# Altium PCB STM32_PCB.PcbDoc (part 1 of 2)
Units mil, origin at the board's own origin, x right, y up, seen from the top; angles counter-clockwise.
Board outline 3550 x 2490 mil, 4 copper layers (Top Layer, Power, Ground, Bottom Layer); 106 components, 122 nets, 470 pads, 207 vias.
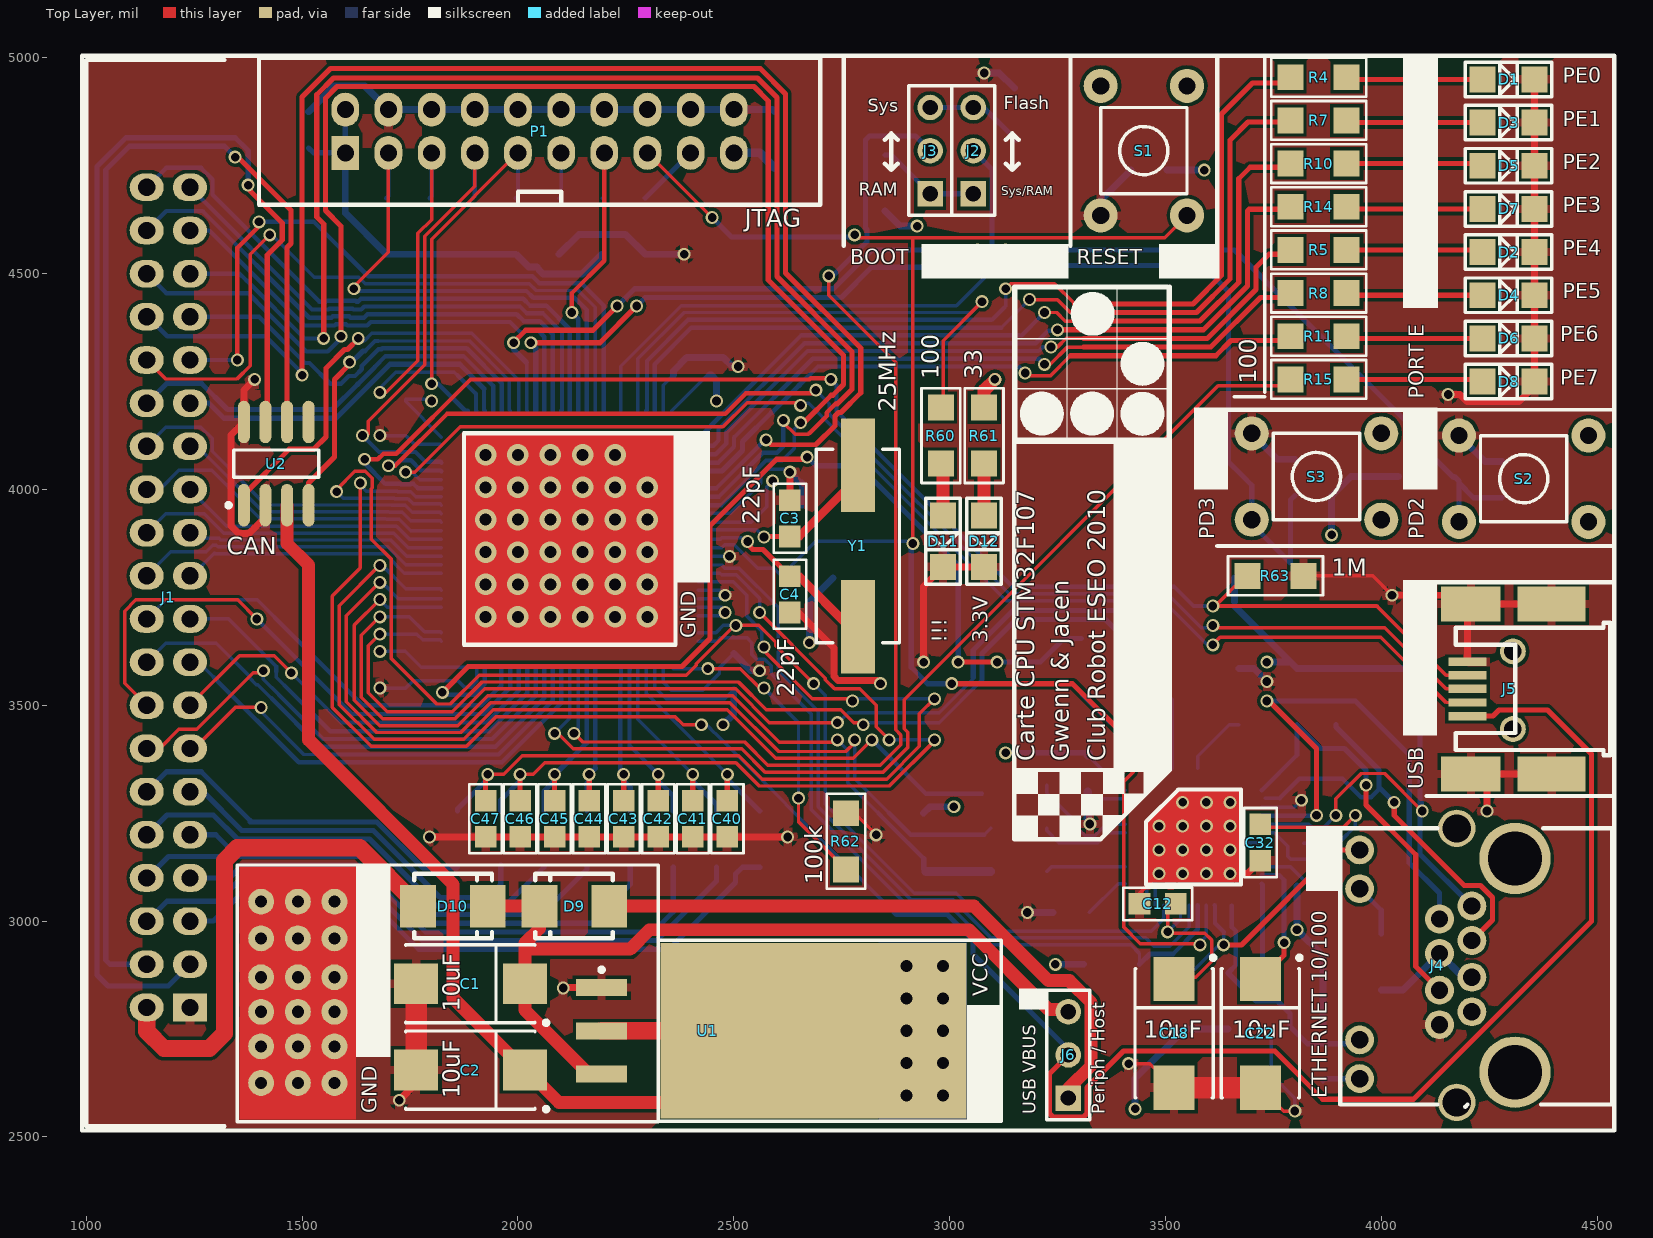
[diagram p0: Top Layer view]
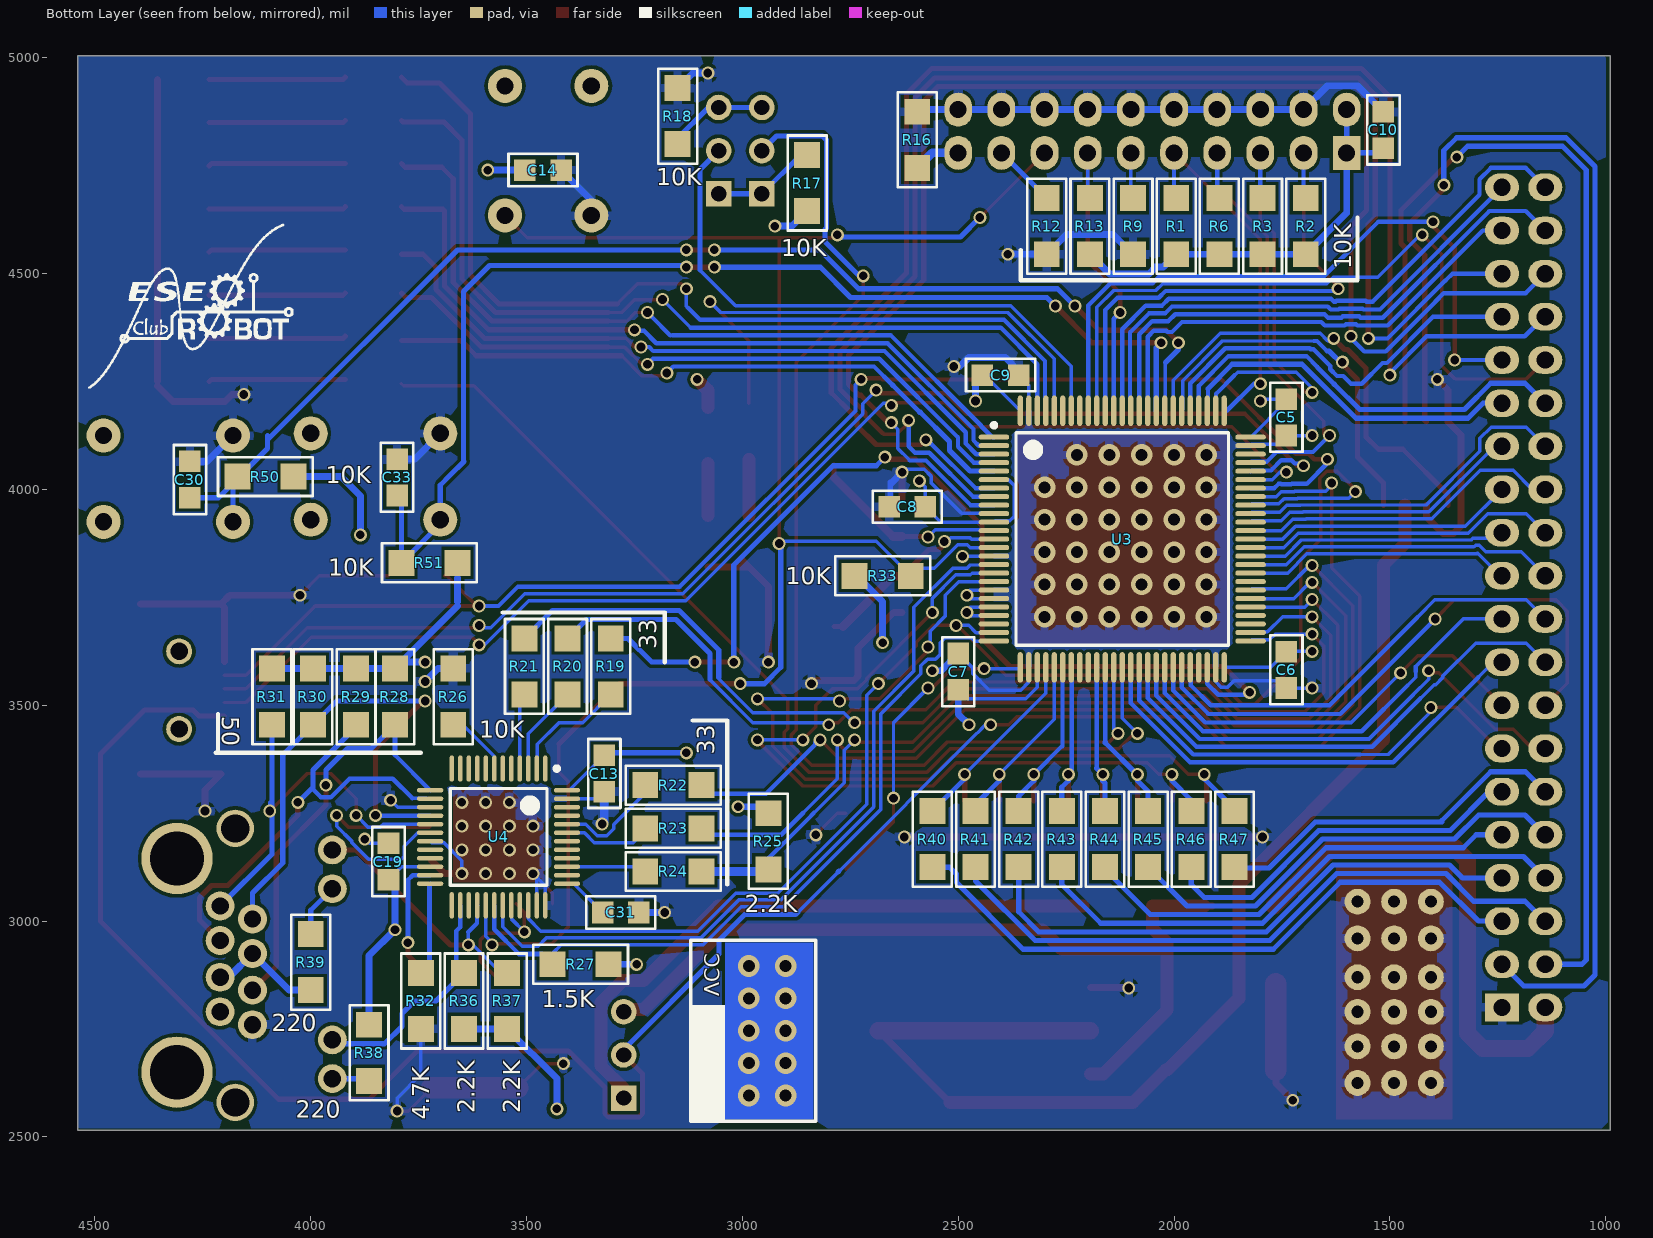
[diagram p1: Bottom Layer view, seen from below]
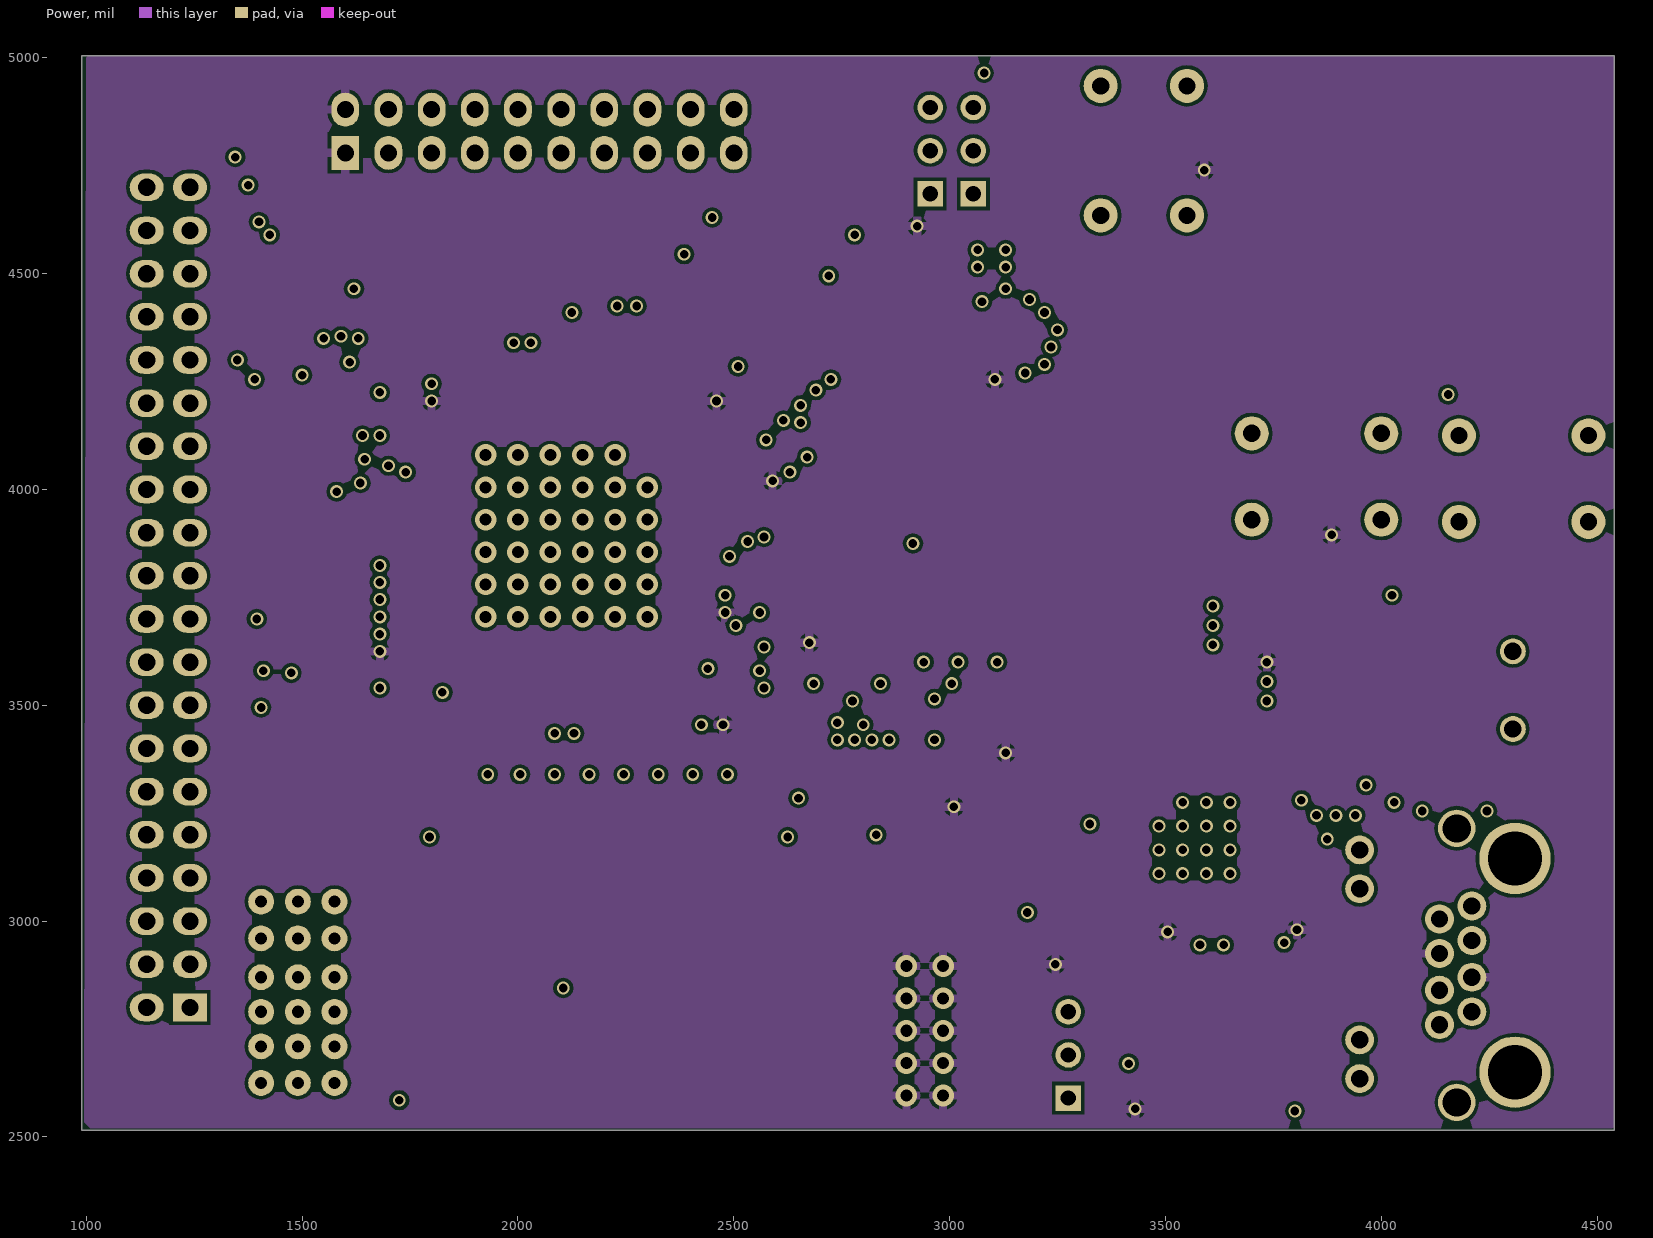
[diagram p2: Power]
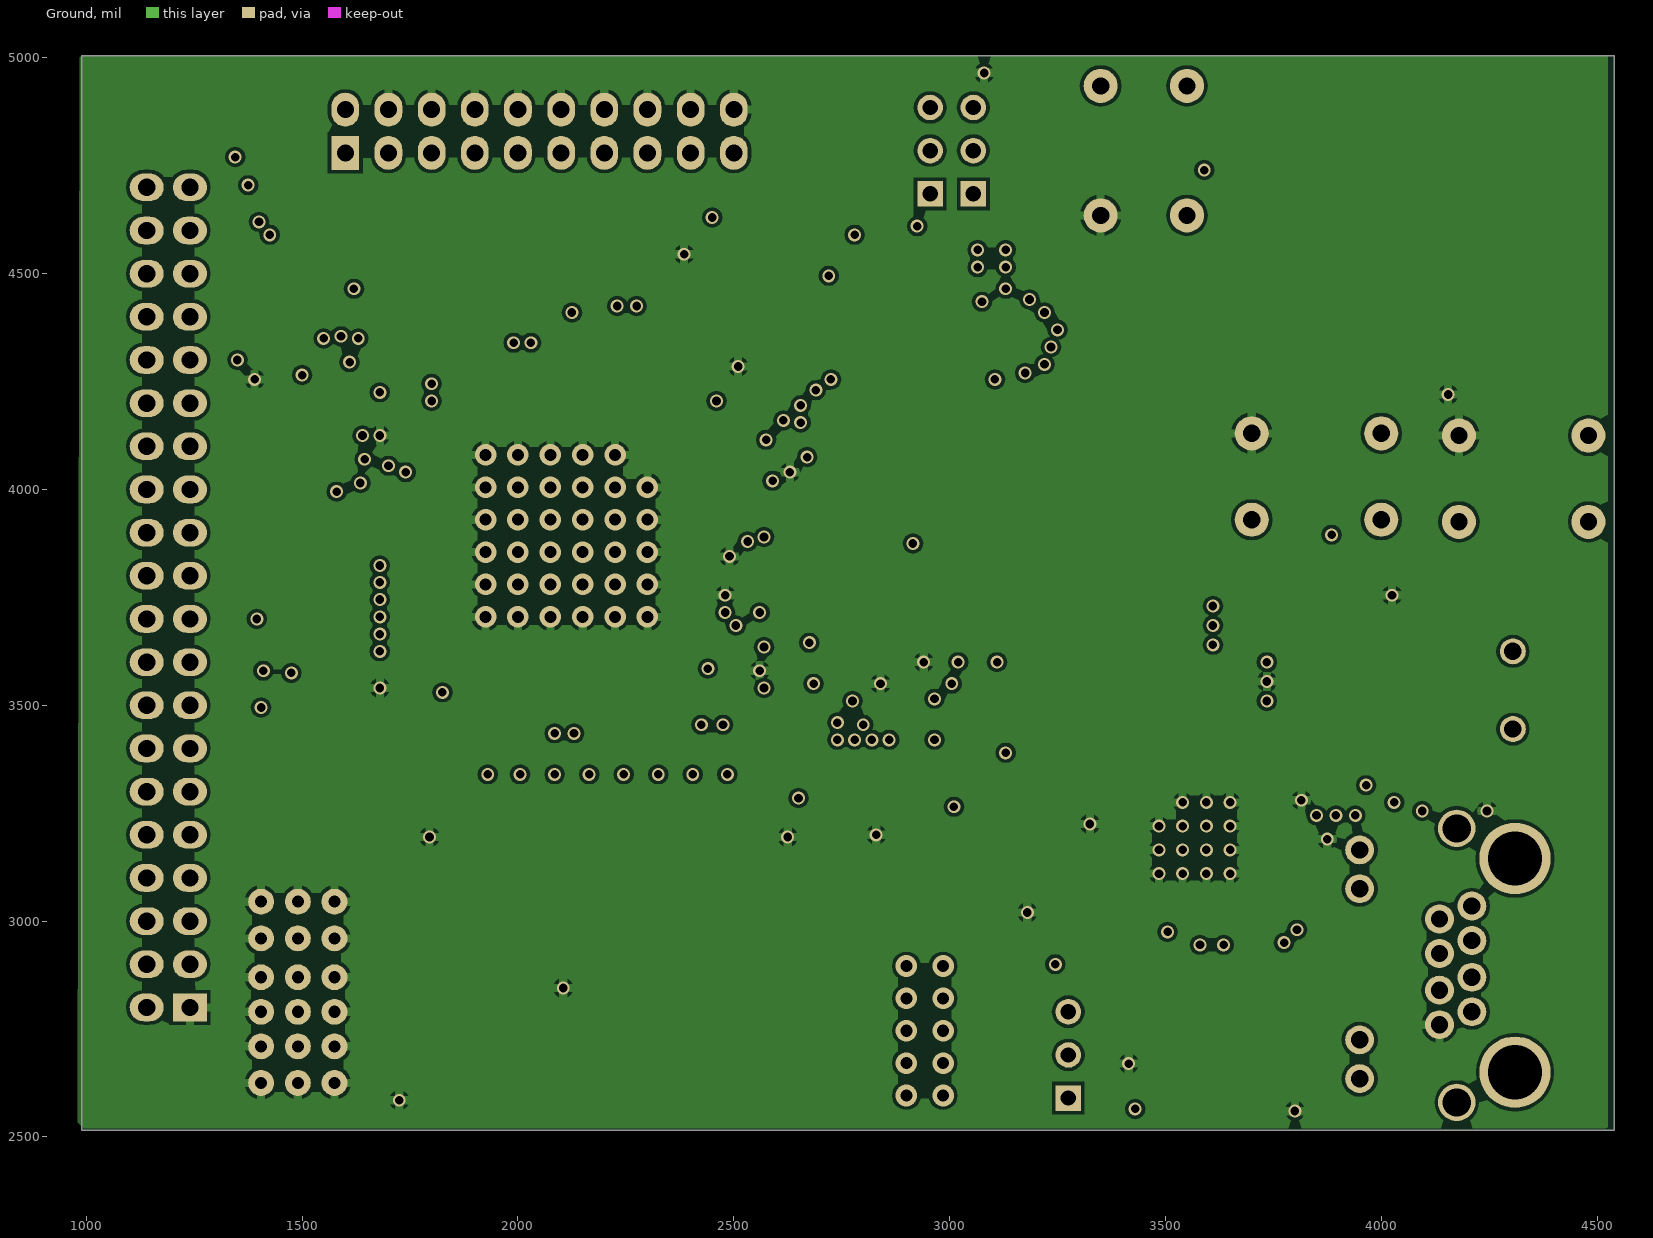
[diagram p3: Ground]
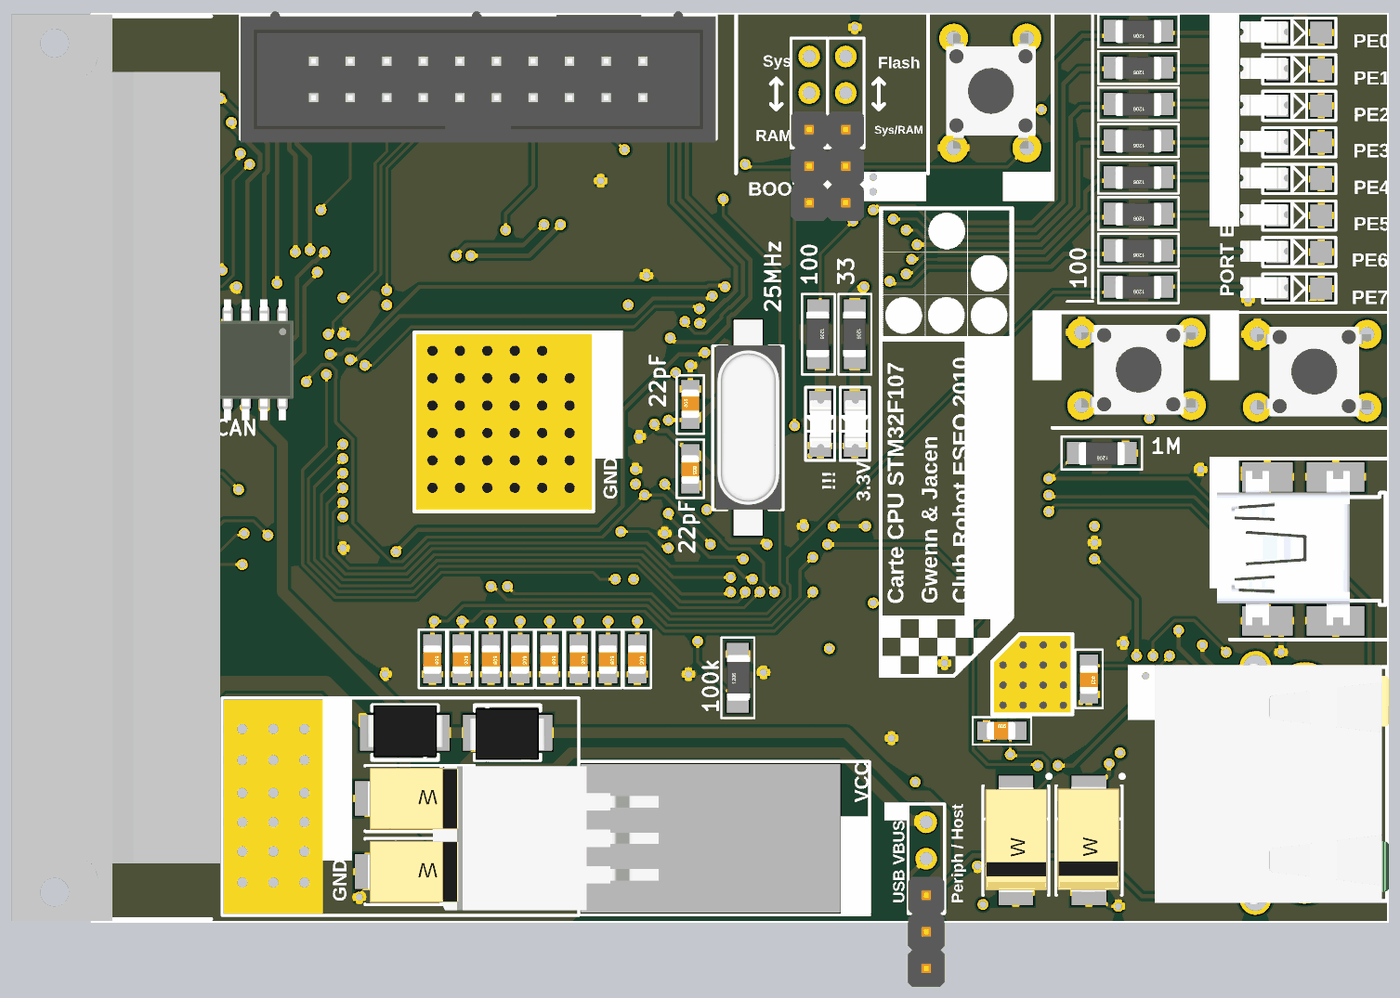
[diagram p5: 3D render of the assembled board from above, using the file's embedded part models]
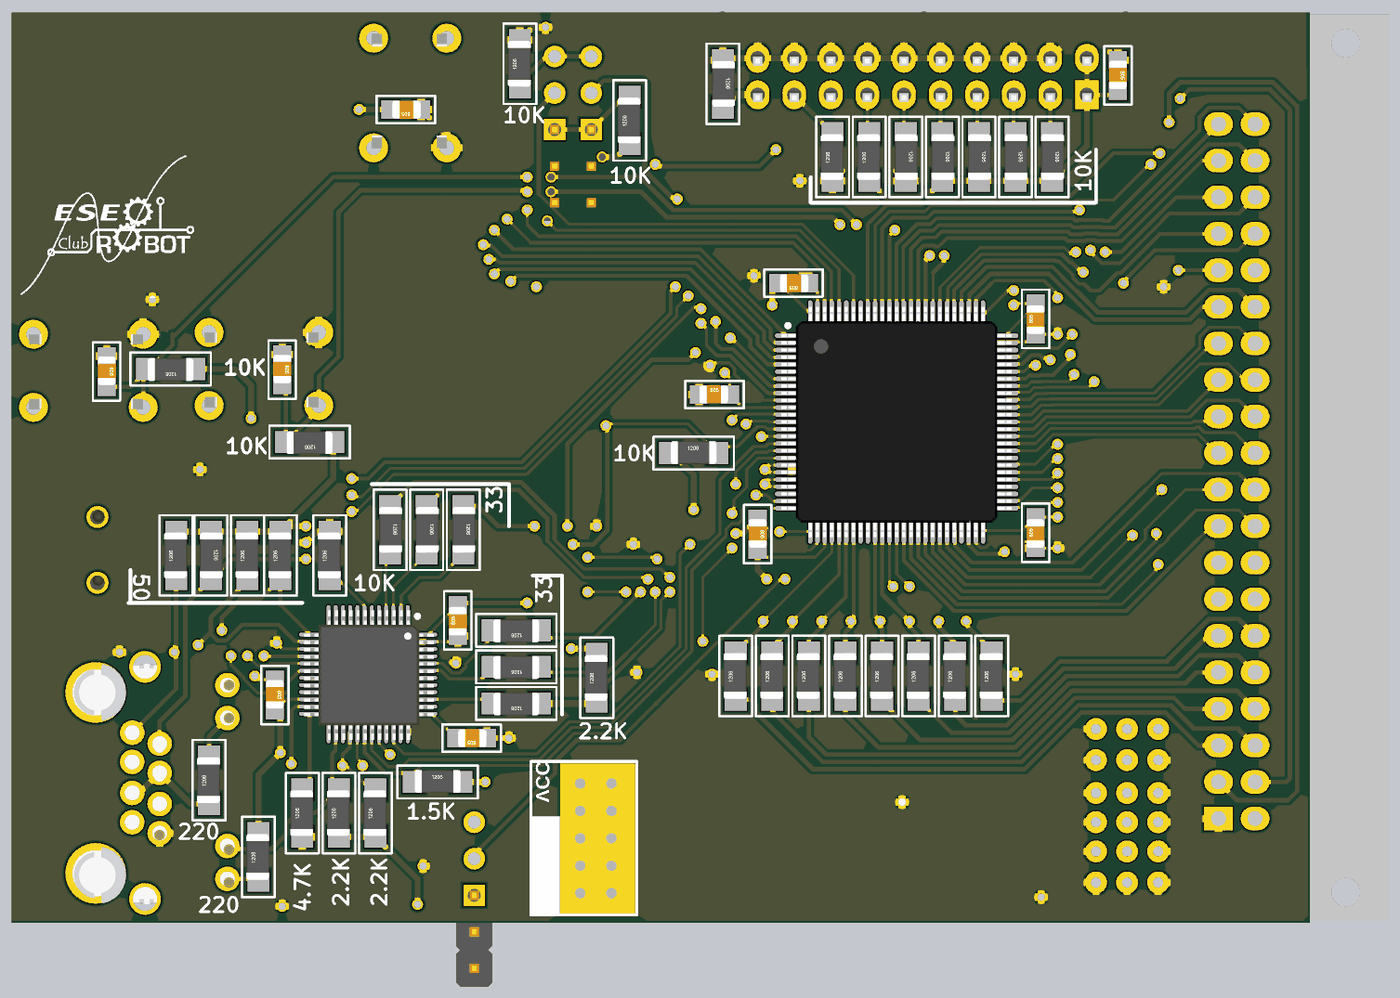
[diagram p6: 3D render of the assembled board from below, using the file's embedded part models]

## Layer stack, top to bottom
Top Layer: signal copper 1.4
Dielectric: core 12.6, FR-4, Dk 4.8
Power: signal copper 1.4
Dielectric: prepreg 12.6, FR-4, Dk 4.8
Ground: signal copper 1.4
Dielectric: core 12.6, FR-4, Dk 4.8
Bottom Layer: signal copper 1.4

## Board outline
990,2515 990,5005 4540,5005 4540,2515

## Design rules (kind name [scope] priority, off if disabled: settings)
Clearance Clearance_QFP [(InComponent('U3') OR InComponent('U4'))] p1: gap=7
Clearance [All] p2: gap=8
HoleSize [All] p1: absolutevalues=TRUE maxlimit=150 minlimit=20 maxpercent=80.000 minpercent=20.000
PlaneConnect [All] p1: planeconnectstyle=Relief reliefexpansion=20 reliefentries=4 reliefconductorwidth=20 reliefairgap=10
PolygonConnect [All] p1: connectstyle=Relief reliefconductorwidth=20 reliefentries=4 polygonreliefangle="90 Angle"
RoutingVias [All] p1: holewidth=20 width=30 viastyle="Through Hole" minholewidth=20 minwidth=30 maxholewidth=28 maxwidth=50
SMDNeckDown [All] p1 off: percent=100.000
SilkscreenOverComponentPads [All] p1: minsilkscreentomaskgap=10
SolderMaskExpansion [All] p1: expansion=4
TestPointUsage [All] p1: valid=0 allowmultiple=FALSE
Testpoint [All] p1: side=15 testpointundercomponent=TRUE minsize=40 maxsize=100 preferedsize=60 minholesize=0 maxholesize=40 preferedholesize=32 testpointgrid=1 style=1023 order=0-112345678
Width Width_POWER [(InNet('GND') OR InNet('VCC') OR InNet('5V'))] p1: maxlimit=150 minlimit=8 preferedwidth=16
Width [All] p2: maxlimit=100 minlimit=8 preferedwidth=12
21 further rules are at their usual default settings.

## Components (designator, comment, footprint, x,y, rotation, side; value= is the part's Value field where it differs from the comment)
C1 "10uF" TC7343-2917 1890,2855 r180 top
C2 "10uF" TC7343-2917 1890,2655 r180 top
C3 "22pF" COND_CMS_0805 2630,3975 r270 top
C4 "22pF" COND_CMS_0805 2630,3715 r90 top
C5 "100nF" COND_CMS_0805 1740,4125 r90 bottom
C6 "100nF" COND_CMS_0805 1740,3540 r90 bottom
C7 "100nF" COND_CMS_0805 2500,3620 r270 bottom
C8 "100nF" COND_CMS_0805 2660,3960 r180 bottom
C9 "100nF" COND_CMS_0805 2360,4265 r0 bottom
C10 "100nF" COND_CMS_0805 1515,4875 r270 bottom
C12 "100nF" COND_CMS_0805 3440,3040 r0 top
C13 "100nF" COND_CMS_0805 3320,3300 r90 bottom
C14 "100nF" COND_CMS_0805 3420,4740 r0 bottom
C18 "10uF" TC7343-2917 3520,2740 r270 top
C19 "100nF" COND_CMS_0805 3820,3180 r270 bottom
C22 "10uF" TC7343-2917 3720,2740 r270 top
C30 "100nF" COND_CMS_0805 4280,4065 r270 bottom
C31 "100nF" COND_CMS_0805 3240,3020 r0 bottom
C32 "100nF" COND_CMS_0805 3720,3140 r90 top
C33 "100nF" COND_CMS_0805 3800,4070 r270 bottom
C40 "100nF" COND_CMS_0805 2485,3195 r90 top
C41 "100nF" COND_CMS_0805 2405,3195 r90 top
C42 "100nF" COND_CMS_0805 2325,3195 r90 top
C43 "100nF" COND_CMS_0805 2245,3195 r90 top
C44 "100nF" COND_CMS_0805 2165,3195 r90 top
C45 "100nF" COND_CMS_0805 2085,3195 r90 top
C46 "100nF" COND_CMS_0805 2005,3195 r90 top
C47 "100nF" COND_CMS_0805 1925,3195 r90 top
D1 "LED" LED_1206 4355,4950 r90 top
D2 "LED" LED_1206 4355,4550 r90 top
D3 "LED" LED_1206 4355,4850 r90 top
D4 "LED" LED_1206 4355,4450 r90 top
D5 "LED" LED_1206 4355,4750 r90 top
D6 "LED" LED_1206 4355,4350 r90 top
D7 "LED" LED_1206 4355,4650 r90 top
D8 "LED" LED_1206 4355,4250 r90 top
D9 "Schottky" DIODE_SMB 2050,3035 r0 top
D10 "Schottky" DIODE_SMB 1930,3035 r180 top
D11 "LED" LED_1206 2985,3820 r0 top
D12 "LED" LED_1206 3080,3820 r0 top
J1 "Extension" HE10/40_FACTO 1240,2800 r90 top
J2 "Jumper" HEADER3 3055,4685 r90 top
J3 "Jumper" HEADER3 2955,4685 r90 top
J4 "ETHERNET 10/100" "RJ45_8/8 W/ LEDS" 4010,3025 r0 top
J5 "USB" MINI_USB_B 4200,3475 r90 top
J6 "Jumper" HEADER3 3275,2590 r90 top
P1 "JTAG" HE10-JTAG-STM 1600,4880 r0 top
R1 "10K" RES_CMS_1206 1995,4675 r270 bottom
R2 "10K" RES_CMS_1206 1695,4675 r270 bottom
R3 "10K" RES_CMS_1206 1795,4675 r270 bottom
R4 "100" RES_CMS_1206 3920,4955 r180 top
R5 "100" RES_CMS_1206 3920,4555 r180 top
R6 "10K" RES_CMS_1206 1895,4675 r270 bottom
R7 "100" RES_CMS_1206 3920,4855 r180 top
R8 "100" RES_CMS_1206 3920,4455 r180 top
R9 "10K" RES_CMS_1206 2095,4675 r270 bottom
R10 "100" RES_CMS_1206 3920,4755 r180 top
R11 "100" RES_CMS_1206 3920,4355 r180 top
R12 "10K" RES_CMS_1206 2295,4545 r90 bottom
R13 "10K" RES_CMS_1206 2195,4545 r90 bottom
R14 "100" RES_CMS_1206 3920,4655 r180 top
R15 "100" RES_CMS_1206 3920,4255 r180 top
R16 "10K" RES_CMS_1206 2595,4875 r270 bottom
R17 "10K" RES_CMS_1206 2850,4645 r90 bottom
R18 "10K" RES_CMS_1206 3150,4800 r90 bottom
R19 "33" RES_CMS_1206 3305,3655 r270 bottom
R20 "33" RES_CMS_1206 3405,3655 r270 bottom
R21 "33" RES_CMS_1206 3505,3655 r270 bottom
R22 "33" RES_CMS_1206 3095,3315 r0 bottom
R23 "33" RES_CMS_1206 3095,3215 r0 bottom
R24 "33" RES_CMS_1206 3095,3115 r0 bottom
R25 "2.2K" RES_CMS_1206 2940,3120 r90 bottom
R26 "10K" RES_CMS_1206 3670,3455 r90 bottom
R27 "1.5K" RES_CMS_1206 3440,2900 r180 bottom
R28 "50" RES_CMS_1206 3805,3455 r90 bottom
R29 "50" RES_CMS_1206 3895,3455 r90 bottom
R30 "50" RES_CMS_1206 3995,3585 r270 bottom
R31 "50" RES_CMS_1206 4090,3455 r90 bottom
R32 "4.7K" RES_CMS_1206 3745,2750 r90 bottom
R33 "10K" RES_CMS_1206 2740,3800 r180 bottom
R36 "2.2K" RES_CMS_1206 3645,2750 r90 bottom
R37 "2.2K" RES_CMS_1206 3545,2750 r90 bottom
R38 "220" RES_CMS_1206 3865,2630 r90 bottom
R39 "220" RES_CMS_1206 4000,2840 r90 bottom
R40 "100" RES_CMS_1206 2560,3125 r90 bottom
R41 "100" RES_CMS_1206 2460,3125 r90 bottom
R42 "100" RES_CMS_1206 2360,3125 r90 bottom
R43 "100" RES_CMS_1206 2260,3125 r90 bottom
R44 "100" RES_CMS_1206 2160,3125 r90 bottom
R45 "100" RES_CMS_1206 2060,3125 r90 bottom
R46 "100" RES_CMS_1206 1960,3125 r90 bottom
R47 "100" RES_CMS_1206 1860,3125 r90 bottom
R50 "10K" RES_CMS_1206 4040,4030 r0 bottom
R51 "10K" RES_CMS_1206 3660,3830 r0 bottom
R60 "100" RES_CMS_1206 2980,4060 r90 top
R61 "33" RES_CMS_1206 3080,4060 r90 top
R62 "100k" RES_CMS_1206 2760,3250 r270 top
R63 "1M" RES_CMS_1206 3820,3800 r180 top
S1 "RESET" TOUCHE_KSA 3350,4635 r0 top
S2 "PD2" TOUCHE_KSA 4180,4125 r270 top
S3 "PD3" TOUCHE_KSA 3700,4130 r270 top
U1 "LM1086IS-3.3" TO-263 2430,2746 r0 top
U2 "CAN" SOIC8 1440,4060 r90 top
U3 "STM32F107VBT6" LQFP100_N 2120,3885 r180 bottom
U4 "DP83848CVV" LQFP48 3565,3195 r270 bottom
Y1 "25MHz" QUARTZ_CMS 2770,3995 r270 top

## Footprints (in the part's own frame and the unit in brackets; to place one, negate y for a bottom-side part, rotate by r counter-clockwise, add the part's x,y. Pads: shape width x height; smd on the part's side, far side on the other; paste and mask are expansions set on the pad)
COND_CMS_0805 [mil] "Capacitor; CMS 0805; 2mmx1.25mm"
  rect 50x50 smd: 1(0,0) 2(84,0)
  silkscreen extent -38,-38 122,38, body extent 1,-24 79,25, height 31
DIODE_SMB [mm] "DO-214-AC/SMA; 2 C-Bend Leads; Body 5.3 x 2.6 mm, inc. leads (LxW)"
  rect 2.1x2.5 smd: 1(0,0) 2(4.1,0)
  silkscreen extent -0.25,-1.91 4.32,1.91, body extent -0.64,-1.91 4.66,1.69, height 2.4
HE10-JTAG-STM [mm] "Connector; HE10; 20 Position; Male; Right Low Profile; Pin Spacing=2.54mm"
  rect 1.63x2 hole 1: 1(0,-2.54)
  oval 1.63x2 hole 1: 2(0,0) 3(2.54,-2.54) 4(2.54,0) 5(5.08,-2.54) 6(5.08,0) 7(7.62,-2.54) 8(7.62,0) 9(10.16,-2.54) 10(10.16,0) 11(12.7,-2.54) 12(12.7,0) 13(15.24,-2.54) 14(15.24,0) 15(17.78,-2.54) 16(17.78,0) 17(20.32,-2.54) 18(20.32,0) 19(22.86,-2.54) 20(22.86,0)
  silkscreen extent -5.08,-5.59 27.94,3.05, body extent -5.08,-5.84 27.94,3.26, height 8.75
HE10/40_FACTO [mm] "Connector; HE10; 40 Position; Male; Right Angle; Pin Spacing=2.54mm"
  rect 1.63x2 hole 1.016: 1(0,0)
  oval 1.63x2 hole 1.016: 2(0,2.54) 3(2.54,0) 4(2.54,2.54) 5(5.08,0) 6(5.08,2.54) 7(7.62,0) 8(7.62,2.54) 9(10.16,0) 10(10.16,2.54) 11(12.7,0) 12(12.7,2.54) 13(15.24,0) 14(15.24,2.54) 15(17.78,0) 16(17.78,2.54) 17(20.32,0) 18(20.32,2.54) 19(22.86,0) 20(22.86,2.54) 21(25.4,0) 22(25.4,2.54) 23(27.94,0) 24(27.94,2.54) 25(30.48,0) 26(30.48,2.54) 27(33.02,0) 28(33.02,2.54) 29(35.56,0) 30(35.56,2.54) 31(38.1,0) 32(38.1,2.54) 33(40.64,0) 34(40.64,2.54) 35(43.18,0) 36(43.18,2.54) 37(45.72,0) 38(45.72,2.54) 39(48.26,0) 40(48.26,2.54)
  silkscreen extent -6.98,-2.03 55.75,6.1, body extent -7.12,-2.16 55.88,12.34, height 8.5
HEADER3 [mm] "Connector; Header; 3 Position"
  rect 1.5x1.5 hole 0.9: 1(0,0)
  round 1.5 hole 0.9: 2(2.54,0) 3(5.08,0)
  silkscreen extent -1.27,-1.27 6.35,1.27, body extent -1.27,-1.27 6.35,1.27, height 10.1
LED_1206 [mil] "3.2 x 1.6 mm SMD CHIP LED LAMP"
  rect 60x60 smd: A(0,120) C(0,0)
  silkscreen extent -40,-40 40,160, body extent -27,-5 30,125, height 54
LQFP48 [mm] "Thin QFP, 48-Leads, Body 7x7mm, Pitch 0.5mm, IPC High Density"
  oval 1.55x0.25 smd: 1(-4.025,2.75) 2(-4.025,2.25) 3(-4.025,1.75) 4(-4.025,1.25) 5(-4.025,0.75) 6(-4.025,0.25) 7(-4.025,-0.25) 8(-4.025,-0.75) 9(-4.025,-1.25) 10(-4.025,-1.75) 11(-4.025,-2.25) 12(-4.025,-2.75) 25(4.025,-2.75) 26(4.025,-2.25) 27(4.025,-1.75) 28(4.025,-1.25) 29(4.025,-0.75) 30(4.025,-0.25) 31(4.025,0.25) 32(4.025,0.75) 33(4.025,1.25) 34(4.025,1.75) 35(4.025,2.25) 36(4.025,2.75)
  oval 0.25x1.55 smd: 13(-2.75,-4.025) 14(-2.25,-4.025) 15(-1.75,-4.025) 16(-1.25,-4.025) 17(-0.75,-4.025) 18(-0.25,-4.025) 19(0.25,-4.025) 20(0.75,-4.025) 21(1.25,-4.025) 22(1.75,-4.025) 23(2.25,-4.025) 24(2.75,-4.025) 37(2.75,4.025) 38(2.25,4.025) 39(1.75,4.025) 40(1.25,4.025) 41(0.75,4.025) 42(0.25,4.025) 43(-0.25,4.025) 44(-0.75,4.025) 45(-1.25,4.025) 46(-1.75,4.025) 47(-2.25,4.025) 48(-2.75,4.025)
  silkscreen extent -4.15,-2.85 2.85,3.55, body extent -4.45,-4.45 4.56,4.56, height 1.6
LQFP100_N [mm] "Thin QFP, 100-Leads, Body 14x14mm, Pitch 0.5mm, IPC Medium Density"
  oval 1.8x0.3 smd: 1(-7.55,6) 2(-7.55,5.5) 3(-7.55,5) 4(-7.55,4.5) 5(-7.55,4) 6(-7.55,3.5) 7(-7.55,3) 8(-7.55,2.5) 9(-7.55,2) 10(-7.55,1.5) 11(-7.55,1) 12(-7.55,0.5) 13(-7.55,0) 14(-7.55,-0.5) 15(-7.55,-1) 16(-7.55,-1.5) 17(-7.55,-2) 18(-7.55,-2.5) 19(-7.55,-3) 20(-7.55,-3.5) 21(-7.55,-4) 22(-7.55,-4.5) 23(-7.55,-5) 24(-7.55,-5.5) 25(-7.55,-6) 51(7.55,-6) 52(7.55,-5.5) 53(7.55,-5) 54(7.55,-4.5) 55(7.55,-4) 56(7.55,-3.5) 57(7.55,-3) 58(7.55,-2.5) 59(7.55,-2) 60(7.55,-1.5) 61(7.55,-1) 62(7.55,-0.5) 63(7.55,0) 64(7.55,0.5) 65(7.55,1) 66(7.55,1.5) 67(7.55,2) 68(7.55,2.5) 69(7.55,3) 70(7.55,3.5) 71(7.55,4) 72(7.55,4.5) 73(7.55,5) 74(7.55,5.5) 75(7.55,6)
  oval 0.3x1.8 smd: 26(-6,-7.55) 27(-5.5,-7.55) 28(-5,-7.55) 29(-4.5,-7.55) 30(-4,-7.55) 31(-3.5,-7.55) 32(-3,-7.55) 33(-2.5,-7.55) 34(-2,-7.55) 35(-1.5,-7.55) 36(-1,-7.55) 37(-0.5,-7.55) 38(0,-7.55) 39(0.5,-7.55) 40(1,-7.55) 41(1.5,-7.55) 42(2,-7.55) 43(2.5,-7.55) 44(3,-7.55) 45(3.5,-7.55) 46(4,-7.55) 47(4.5,-7.55) 48(5,-7.55) 49(5.5,-7.55) 50(6,-7.55) 76(6,7.55) 77(5.5,7.55) 78(5,7.55) 79(4.5,7.55) 80(4,7.55) 81(3.5,7.55) 82(3,7.55) 83(2.5,7.55) 84(2,7.55) 85(1.5,7.55) 86(1,7.55) 87(0.5,7.55) 88(0,7.55) 89(-0.5,7.55) 90(-1,7.55) 91(-1.5,7.55) 92(-2,7.55) 93(-2.5,7.55) 94(-3,7.55) 95(-3.5,7.55) 96(-4,7.55) 97(-4.5,7.55) 98(-5,7.55) 99(-5.5,7.55) 100(-6,7.55)
  silkscreen extent -7.68,-6.25 6.25,6.82, body extent -8,-8 8,8, height 1.6
MINI_USB_B [mm] "Connector; USB; Type B; miniature; Pin Spacing=0.8mm"
  rect 0.5x2.25 smd: 1(0,0) 2(0.8,0) 3(1.6,0) 4(2.4,0) 5(3.2,0)
  rect 2.05x3.5 smd: 6(6.6,-0.2) 9(-3.4,-0.2)
  rect 2.05x4 smd: 7(6.6,-4.935) 8(-3.4,-4.935)
  round 1.524 hole 1.016: 10(3.81,-2.667) 11(-0.762,-2.667)
  silkscreen extent -2.3,-8.4 5.5,0.7, body extent -3.7,-8.51 7,0.69, height 3.95
QUARTZ_CMS [mil] "HC49/4HSMX CRYSTALS; 11.4mm x 4.9mm; Pin spacing=9.5mm"
  rect 216.53x78.73 smd: 1(-61.2,17.6) 2(312.8,17.6)
  silkscreen extent -98,-79 350,114, body extent -170,-70 421,107, height 99
RES_CMS_1206 [mil] "Resistor; CMS 1206; 3.2mmx1.6mm"
  rect 60x60 smd: 1(0,0) 2(130,0)
  silkscreen extent -45,-45 175,45, body extent 2,-30 128,33, height 39
"RJ45_8/8 W/ LEDS" [mm] "Connector; RJ45; 8P/8C; Low Profil; Right Angle; Pin Spacing=2.54mm"
  round 1.7 hole 1.016: 1(5.08,0.254) 2(3.175,-0.508) 3(5.08,-1.778) 4(3.175,-2.54) 5(5.08,-3.937) 6(3.175,-4.699) 7(5.08,-5.969) 8(3.175,-6.731) 9(-1.524,3.556) 10(-1.524,1.27) 11(-1.524,-7.62) 12(-1.524,-9.906)
  round 4.2 hole 3.2: FIX1(7.62,3.048) FIX2(7.62,-9.525)
  round 2.2 hole 1.651: FIX3(4.191,4.826) FIX4(4.191,-11.303)
  silkscreen extent -2.67,-11.56 13.33,4.83, body extent -2.79,-11.66 13.46,5.05, height 14.75
SOIC8 [mm] "8-Pin Small Outline Integrated Circuit 1.27 mm Pitch, IPC Low Density"
  oval 2.5x0.7 smd: 1(-2.45,1.905) 2(-2.45,0.635) 3(-2.45,-0.635) 4(-2.45,-1.905) 5(2.45,-1.905) 6(2.45,-0.635) 7(2.45,0.635) 8(2.45,1.905)
  silkscreen extent -2.57,-2.5 0.8,2.93, body extent -4.32,-2.67 4.07,2.71, height 2.2
TC7343-2917 [mm] "Capacitor, SM Tantalum; Body 7.3 x 4.3 mm (LxW typ)"
  rect 2.6x2.4 smd: 1(-3.2,0) 2(3.2,0)
  silkscreen extent -4.58,-2.3 3.8,2.42, body extent -3.7,-2.13 3.6,2.17, height 2.2
TO-263 [mm] "D2-PAK, 4-Leads, Body 8.6x10.2mm, Pitch 2.54mm, Lead Span 14.2mm, IPC High Density"
  rect 3x1 smd: 1(-6,2.54) 2(-6,0) 3(-6,-2.54)
  rect 18x10.35 smd: 4(6.477,0)
  silkscreen extent -6.12,-5.33 17.53,5.33, body extent -7.11,-5 8.56,5, height 4.68
TOUCHE_KSA [mil] "Switch; Push Button; mounted Pcb; Pin Spacing=7.62mm/5.08mm"
  round 79 hole 40: 1(0,0) 2(200,0) 3(200,300) 4(0,300)
  silkscreen extent 0,50 200,250, body extent -20,0 224,312, height 157

## Part data
C1 C2 C18 C22: library part "Cap Pol3", "Polarized Capacitor (Surface Mount)"
C3 C4 C5 C6: library part CONDENSATEUR, "Capacitor"
C7 C8 C9 C10 C12 C13 C14 C19 C30 C31 C32 C33 C40 C41 C42 C43 C44 C45 C46 C47: library part "Cap Semi", "Capacitor (Semiconductor SIM Model)"
D1 D2 D3 D4 D5 D6 D7 D8 D11 D12: "Typical RED, GREEN, YELLOW, AMBER GaAs LED"
D9 D10: library part DIODE_SCHOTTKY_SMB, "Schottky Diode"
J1: library part CONNECTEUR_HE10_40
J2 J3 J6: library part BARRETTE3, "Header, 3-Pin"
J4: library part RJ45_8/8, "Right Angle, Standard Profile, RJ45-Keyed, Flange Mount PCB Jack"
J5: library part USB_Mini, "USB 1.1, Right Angle, SMT, A Type, Receptacle, 4 Position, White"
P1: library part "Header 10X2", "Header, 10-Pin, Dual row"
R1 R2 R3 R6 R9 R12 R13 R16 R17 R18 R33 R40 R41 R42 R43 R44 R45 R46 R47 R50 R51: library part "Res Semi", "Semiconductor Resistor"
R4 R5 R7 R8 R10 R11 R14 R15 R19 R20 R21 R22 R23 R24 R25 R26 R27 R28 R29 R30 R31 R32 R36 R37 R38 R39 R60 R61 R62 R63: library part RESISTANCE, "Resistor"
S1 S2 S3: library part "BOUTON POUSSOIR", "Switch"
U1: "1.5A Low Dropout Positive Regulators"
U2: library part MCP2551, "High Speed Can Transceiver"
U3: library part STM32F103VBT6, "STM32 ARM-based 32-bit MCU with 64 Kbytes Flash, 100-pin LQFP, Industrial Temperature"
U4: "PHYTER® Commercial Temperature Single Port 10/100 Mb/s Ethernet Physical Layer Transceiver"
Y1: library part QUARTZ, "Crystal Oscillator"

## Free pads (board coordinates)
  round 60 hole 28: 1(1575,2625) 1(1575,2710) 1(1575,2790) 1(1575,2870) 1(1575,2960) 1(1575,3045) 2(1490,2625) 2(1490,2710) 2(1490,2790) 2(1490,2870) 2(1490,2960) 2(1490,3045) 3(1405,2625) 3(1405,2710) 3(1405,2790) 3(1405,2870) 3(1405,2960) 3(1405,3045)

## Via types
v1: diameter 30, hole 20, Top Layer to Bottom Layer, 162 vias
v2: diameter 50, hole 28, Top Layer to Bottom Layer, 45 vias

## Nets (pads, with @x,y where several pads share a name; then routed paths per layer and width w, separated by ;. In a path a pad name is that pad's centre, name@x,y a point inside that pad or via, vN(x,y) a via of type N, cw(c..) or ccw(c..) an arc to the next point about the centre after c; other vN are vias at no path point)
5V: C1.1 D9.1 D10.1 J6.3 U1.3 | length 1989.4
  Top Layer w16: D10.1@1911.16,3035 D10.1@1930,3035
  Top Layer w30: D10.1@1930,3035 D9.1@2050,3035 2050,2983.03 2015.98,2949.02 2015.98,2935 ; U1.3@2193.78,2646 2164,2646 2015.98,2794.02 C1.1@2015.98,2855 2015.98,2935 ; J6.3@3275,2790 3270,2795 3230,2795 3045,2980 2755,2980 2305,2980 2260,2935 2015.98,2935
AN4: J1.5 R40.1 | length 1511.8
  Bottom Layer w12: J1.5@1240,3000 1295,3000 1385,3090 1615,3090 1770,2935 2349.8,2935 2504,3089.2 2504,3109 2520,3125 R40.1@2560,3125
AN5: J1.6 R41.1 | length 1518.8
  Bottom Layer w12: J1.6@1140,3000 1140.54,3000 1186.63,3046.09 1306.09,3046.09 1370,3110 1623.28,3110 1778.28,2955 2321.72,2955 2460,3093.28 R41.1@2460,3125
AN6: J1.7 R42.1 | length 1319.4
  Bottom Layer w12: J1.7@1240,3100 1331.72,3100 1361.72,3130 1631.57,3130 1786.57,2975 2313.43,2975 2360,3021.57 R42.1@2360,3125
AN7: J1.8 R43.1 | length 1282.2
  Bottom Layer w12: J1.8@1140,3100 1140.54,3100 1190.54,3150 1639.85,3150 1794.85,2995 2170,2995 2260,3085 R43.1@2260,3125
AN8: J1.9 R44.1 | length 1045.1
  Bottom Layer w12: J1.9@1240,3200 1300,3200 1330,3170 1648.14,3170 1803.14,3015 2055,3015 2160,3120 R44.1@2160,3125
AN9: J1.10 R45.1 | length 1063.8
  Bottom Layer w12: J1.10@1140,3200 1140.54,3200 1186.63,3246.09 1293.91,3246.09 1350,3190 1656.42,3190 1811.42,3035 1930,3035 1970,3035 R45.1@2060,3125
AN12: J1.11 R46.1 | length 878.9
  Bottom Layer w12: J1.11@1240,3300 1270,3300 1360,3210 1664.71,3210 1819.71,3055 1930,3055 1960,3085 R46.1@1960,3130
AN13: J1.12 R47.1 | length 863.8
  Bottom Layer w12: J1.12@1140,3300 1186.09,3346.09 1266.37,3346.09 1380,3232.46 1380,3230 ; 1410,3230 1380,3230 ; R47.1@1860,3125 1857.99,3122.99 1780,3122.99 1672.99,3230 1380,3230
GND: C1.2 C2.2 C3.1 C4.1 C5.1 C6.1 C7.1 C8.1 C9.1 C10.1 C12.1 C13.1 C14.1 C18.2 C19.1 C22.2 C30.1 C31.1 C32.1 C33.1 C40.1 C41.1 C42.1 C43.1 C44.1 C45.1 C46.1 C47.1 D1.C D2.C D3.C D4.C D5.C D6.C D7.C D8.C D11.C D12.C J1.1 J4.8 J5.5 J5.6 J5.7 J5.8 J5.9 P1.4 P1.6 P1.8 P1.10 P1.12 P1.14 P1.16 P1.18 P1.20 pad.1 pad.2 pad.3 R9.2 R12.1 R16.1 R18.2 R26.2 R32.1 R62.1 R63.1 S1.1 S2.1 S3.1 U1.1 U2.2 U2.8 U3.10 U3.15 U3.19 U3.20 U3.27 U3.49 U3.74 U3.99 U4.15 U4.19 U4.35 U4.36 U4.47 | length 9799.6
  Top Layer w8: R62.1@2760,3250 2780,3250 v1(2830,3200) ; v1(3415,2670) 3464.02,2670 C18.2@3520,2614.02 ; C12.1@3440,3040 3440,3065 v1(3485,3110) ; C22.2@3720,2614.02 3774.02,2560 v1(3800,2560) ; R63.1@3820,3800 3980,3800 v1(4025,3755)
  Top Layer w16: v1(1390,4255) 1365,4230 U2.8@1365,4156.46 1335.22,4126.68 1335.22,3915.78 1352.66,3898.33 1377.34,3898.33 1415,3936 U2.2@1415,3963.54 ; v1(1725,2585) 1764.02,2624.02 C1.2@1764.02,2855 ; v1(1795,3195) C47.1@1925,3195 C46.1@2005,3195 C45.1@2085,3195 C44.1@2165,3195 C43.1@2245,3195 C42.1@2325,3195 C41.1@2405,3195 C40.1@2485,3195 v1(2625,3195) ; v1(2105,2845) 2106,2846 U1.1@2193.78,2846 ; C4.1@2630,3715 2650,3715 2732.23,3632.77 2732.23,3567.31 2741.61,3557.93 2832.07,3557.93 v1(2840,3550) ; C3.1@2630,3975 v1(2630,4040) ; v1(2940,3600) 2940,3775 D11.C@2985,3820 ; D11.C@3002.5,3837.5 D11.C@2985,3820 ; D12.C@3080,3820 D11.C@2985,3820 ; v1(3650,3110) 3690,3110 C32.1@3720,3140 ; v1(4025,3755) 4187.72,3755 J5.6@4207.87,3734.84 ; v1(4155,4220) 4182.37,4220 4198.37,4204 4319,4204 D8.C@4355,4240 ; J5.5@4200,3600.98 4200,3726.97 J5.6@4207.87,3734.84 ; v1(4245,3255) 4245,3304.02 J5.9@4207.87,3341.14 J5.8@4394.29,3341.14 ; D8.C@4355,4250 D6.C@4355,4350 D4.C@4355,4450 D2.C@4355,4550 D7.C@4355,4650 D5.C@4355,4750 D3.C@4355,4850 D1.C@4355,4950 ; J5.7@4394.29,3734.84 J5.6@4207.87,3734.84
  Top Layer w50: C2.2@1764.02,2655 C1.2@1764.02,2855 ; C18.2@3520,2614.02 C22.2@3720,2614.02
  Bottom Layer w8: v1(1680,3540) C6.1@1740,3540 1757,3557 1861.1,3557 1876.78,3541.32 1890.78,3541.32 1905,3555.54 1905,3586.22 U3.49@1903.46,3587.76 ; v1(1680,4125) C5.1@1740,4125 1760.69,4104.31 1819.98,4104.31 U3.74@1822.76,4101.54 ; U3.27@2336.54,3587.76 2336.54,3554 2355.54,3535 2428.18,3535 2467,3573.82 2467,3587 C7.1@2500,3620 ; U3.99@2336.54,4182.24 2336.54,4241.54 C9.1@2360,4265 ; U3.20@2417.24,3747.2 2477.2,3747.2 2485,3755 2473.11,3766.89 U3.19@2417.24,3766.89 ; U3.15@2417.24,3845.63 2489.37,3845.63 v1(2490,3845) ; U3.10@2418.19,3945 2492.37,3945 2563,4015.63 2563,4031.18 2578.82,4047 2628,4047 2657.5,4017.5 2660,4015 ; C8.1@2657.5,3962.5 C8.1@2660,3960 ; C13.1@3320,3300 3336.42,3283.58 U4.47@3406.54,3283.58 ; U4.36@3456.73,3036.54 3456.73,3081.73 v1@3476.42,3101.42 ; U4.35@3476.42,3036.54 v1@3476.42,3101.42 ; v1(3485,3110) v1@3476.42,3101.42 ; v1(3650,3110) 3650,3140.11 3691.28,3181.39 3719.7,3181.39 U4.19@3723.46,3185.16 ; U4.15@3723.46,3263.9 3798.9,3263.9 v1(3815,3280) ; R32.1@3745,2750 3745,2645 3800,2590 v1(3800,2560) ; C19.1@3820,3180 3865,3180 v1(3875,3190)
  Bottom Layer w12: C8.1@2657.5,3962.5 2657.5,4017.5
  Bottom Layer w16: C10.1@1515,4875 1575.37,4935.37 1644.63,4935.37 P1.4@1700,4880 P1.6@1800,4880 P1.8@1900,4880 P1.10@2000,4880 P1.12@2100,4880 P1.14@2200,4880 P1.16@2300,4880 P1.18@2400,4880 P1.20@2500,4880 2590,4880 R16.1@2595,4875 ; R9.2@2095,4545 2141,4591 2249,4591 R12.1@2295,4545 v1(2385,4545) ; C9.1@2360,4265 2360,4275 2391,4306 2475.63,4306 2496.63,4285 v1(2510,4285) ; C7.1@2500,3620 2540,3580 v1(2560,3580) ; v1(2630,4040) 2655,4015 ; v1(3080,4965) 3115,4965 R18.2@3150,4930 ; v1(3180,3020) C31.1@3240,3020 ; S1.1@3350,4635 3350,4670 C14.1@3420,4740 ; R26.2@3670,3585 3705,3585 v1(3735,3555) ; S3.1@3700,4130 3760,4070 C33.1@3800,4070 ; S2.1@4180,4125 4240,4065 C30.1@4280,4065
  Bottom Layer w20: C13.1@3320,3300 3320,3230 v1(3325,3225)
  other v1: 3540,3110 3595,3110 3485,3165 3540,3165 3595,3165 3650,3165 3485,3220 3540,3220 3595,3220 3650,3220 3540,3275 3595,3275 3650,3275 2480,3755
  other v2: 1925,3705 2000,3705 2075,3705 2150,3705 2225,3705 2300,3705 1925,3780 2000,3780 2075,3780 2150,3780 2225,3780 2300,3780 1925,3855 2000,3855 2075,3855 2150,3855 2225,3855 2300,3855 1925,3930 2000,3930 2075,3930 2150,3930 2225,3930 2300,3930 1925,4005 2000,4005 2075,4005 2150,4005 2225,4005 2300,4005 1925,4080 2000,4080 2075,4080 2150,4080 2225,4080
NetC3_2: C3.2 U3.12 Y1.1 | length 463
  Top Layer w12: v1@2570,3891 C3.2@2630,3891 ; Y1.1@2787.6,4027.6 Y1.1@2787.6,4056.2
  Top Layer w20: C3.2@2630,3891 2651,3891 Y1.1@2787.6,4027.6
  Bottom Layer w8: U3.12@2417.24,3904.69 2418.93,3906.37 2553.63,3906.37 v1(2570,3890)
NetC4_2: C4.2 U3.13 Y1.2 | length 460.6
  Top Layer w12: v1(2532,3879.37) 2532,3873 2544,3861 2568,3861 C4.2@2630,3799 ; Y1.2@2767.8,3682.2 Y1.2@2787.6,3682.2
  Top Layer w20: C4.2@2630,3799 2651,3799 Y1.2@2767.8,3682.2
  Bottom Layer w8: U3.13@2417.24,3885 2469.19,3885 2472.19,3888 2517,3888 2525.63,3879.37 v1(2532,3879.37)
NetC22_1: C22.1 U4.23 | length 308.1
  Top Layer w12: C22.1@3720,2865.98 3775,2920.98 v1(3775,2950)
  Bottom Layer w10: U4.23@3723.46,3106.42 3763.58,3106.42 3775,3095
  Bottom Layer w12: v1(3775,2950) 3775,3095
NetC30_2: C30.2 R50.2 S2.2 U3.83 | length 2901.4
  Top Layer w12: v1(1990,4340) 1990,4341.01 2017.99,4369 2174,4369 v1(2230,4425) ; v1(3065,4555) v1(3130,4555)
  Bottom Layer w8: 2020,4294.24 2020,4183.82 U3.83@2021.57,4182.24
  Bottom Layer w12: v1(1990,4340) 1990,4324.24 2020,4294.24 ; v1(2230,4425) 2270,4465 2731.01,4465 2821.01,4555 v1(3065,4555) ; v1(3130,4555) 3660,4555 4100,4115 ; 4100,4125 4100,4095 R50.2@4167.5,4027.5 ; R50.2@4170,4030 4180,4020 R50.2@4180,4015 ; S2.2@4180,3925 R50.2@4180,4015 ; C30.2@4280,3981 4214,3981 R50.2@4180,4015
NetC31_2: C31.2 U4.37 | length 110.2
  Bottom Layer w8: C31.2@3324,3020 3390.73,3086.73 U4.37@3406.54,3086.73
NetC32_2: C32.2 U4.18 | length 548.8
  Top Layer w8: C32.2@3720,3224 3726,3218 3913,3218 v1(3940,3245)
  Bottom Layer w8: v1(3940,3245) 3940,3220 3904.54,3184.54 3904.54,3181.35 3866.18,3143 3790.03,3143 3783,3150.03 3783,3173.73 3751.73,3205 U4.18@3723.62,3205 ; U4.18@3723.62,3205 U4.18@3723.46,3204.84 U4.18@3723.62,3205
NetC33_2: C33.2 R51.2 S3.2 U3.84 | length 2728.3
  Top Layer w12: v1(2030,4340) 2190,4340 v1(2275,4425) ; v1(3065,4515) v1(3130,4515)
  Bottom Layer w12: v1(2030,4340) 2041.26,4328.74 U3.84@2041.26,4182.24 ; v1(2275,4425) 2295,4445 2749.3,4445 2819.3,4515 v1(3065,4515) ; v1(3130,4515) 3134,4519 3586,4519 3646.5,4458.5 3646.5,4063.5 ; 3645,4065 3677.84,4032.16 3700,4010 S3.2@3700,3930 3700,3920 R51.2@3790,3830 3790,3976 C33.2@3800,3986
NetC40_2: C40.2 R40.2 U3.29 | length 502.6
  Top Layer w12: C40.2@2485,3279 v1(2485,3340)
  Bottom Layer w8: U3.29@2297.17,3587.76 2297.17,3527.83 v1(2485,3340)
  Bottom Layer w12: v1(2485,3340) 2485,3330 R40.2@2560,3255
NetC41_2: C41.2 R41.2 U3.30 | length 469.4
  Top Layer w12: C41.2@2405,3279 v1(2405,3340)
  Bottom Layer w8: U3.30@2277.48,3587.76 2277.48,3467.52 v1(2405,3340)
  Bottom Layer w12: v1(2405,3340) 2405,3325 2460,3270 R41.2@2460,3255
NetC42_2: C42.2 R42.2 U3.31 | length 429.8
  Top Layer w12: C42.2@2325,3279 v1(2325,3340)
  Bottom Layer w10: 2258.57,3405.43 U3.31@2258.57,3582.14 ; 2259.57,3405.43 v1(2325,3340) ; U3.31@2259.57,3582.14 U3.31@2259.53,3582.19
  Bottom Layer w12: v1(2325,3340) 2325,3325 2360,3290 R42.2@2360,3255
NetC43_2: C43.2 R43.2 U3.32 | length 403.3
  Top Layer w12: C43.2@2245,3279 v1(2245,3340)
  Bottom Layer w10: v1@2238.89,3346.11 2237,3348 2237,3556.43 2238.89,3558.32 U3.32@2238.89,3586.98
  Bottom Layer w12: v1@2238.89,3346.11 v1(2245,3340) 2245,3325 2260,3310 R43.2@2260,3255
NetC44_2: C44.2 R44.2 U3.35 | length 401.9
  Top Layer w12: C44.2@2165,3279 v1(2165,3340)
  Bottom Layer w10: 2179.37,3354.37 U3.35@2179.37,3587.44
  Bottom Layer w12: R44.2@2160,3255 2160,3320 2165,3325 v1(2165,3340) 2179.37,3354.37 ; U3.35@2179.06,3587.76 U3.35@2179.37,3587.44
NetC45_2: C45.2 R45.2 U3.36 | length 435.5
  Top Layer w12: C45.2@2085,3279 v1(2085,3340)
  Bottom Layer w10: 2159.37,3414.37 U3.36@2159.37,3587.76
  Bottom Layer w12: R45.2@2060,3255 2060,3300 2085,3325 v1(2085,3340) 2086.01,3340 2159.37,3413.36 2159.37,3414.37
NetC46_2: C46.2 R46.2 U3.17 | length 1962.2
  Top Layer w8: v1(2005,3340) 2035,3340 2062,3367 2505.12,3367 2559.12,3313 2860.63,3313 2965,3417.37 v1(2965,3420) ; v1(2560,3715) 2712.23,3562.77 2712.23,3559.02 2733.32,3537.93 2792.07,3537.93 2830,3500 2830,3450 v1(2860,3420)
  Top Layer w12: C46.2@2005,3279 v1(2005,3340)
  Bottom Layer w8: U3.17@2417.24,3806.26 2467.93,3806.26 2472.19,3802 2505.37,3802 2560,3747.37 v1(2560,3715) ; v1(2860,3420) v1(2965,3420)
  Bottom Layer w12: R46.2@1960,3255 1960,3280 2005,3325 v1(2005,3340)
NetC47_2: C47.2 R47.2 U3.18 | length 2054.7
  Top Layer w8: v1(1930,3340) 1966.82,3340 2009.82,3383 2511.75,3383 2565.75,3329 2854,3329 2930,3405 2930,3480 v1(2965,3515) ; v1@2570,3626.82 2681.82,3515 v1@2770,3515
  Top Layer w12: C47.2@1925,3279 v1@1925,3335 ; v1@2770,3505 v1(2775,3510)
  Bottom Layer w8: U3.18@2417.24,3786.57 2417.82,3786 2498.75,3786 2530,3754.75 2530,3706.82 2565,3671.82 v1@2565,3640 ; v1@2775,3515 v1(2965,3515)
  Bottom Layer w12: R47.2@1860,3255 1860,3260 v1@1930,3330
  other v1: 2570,3635
NetD1_1: D1.A R4.1 | length 317.1
  Top Layer w12: R4.1@3920,4955 3925,4950 D1.A@4235,4950
NetD2_1: D2.A R5.1 | length 317.1
  Top Layer w12: R5.1@3920,4555 4230,4555 D2.A@4235,4550
NetD3_1: D3.A R7.1 | length 317.1
  Top Layer w12: R7.1@3920,4855 3925,4850 D3.A@4235,4850
NetD4_1: D4.A R8.1 | length 317.1
  Top Layer w12: R8.1@3920,4455 3925,4450 D4.A@4235,4450
NetD5_1: D5.A R10.1 | length 317.1
  Top Layer w12: R10.1@3920,4755 4230,4755 D5.A@4235,4750
NetD6_1: D6.A R11.1 | length 317.1
  Top Layer w12: R11.1@3920,4355 3925,4350 D6.A@4235,4350
NetD7_1: D7.A R14.1 | length 317.1
  Top Layer w12: R14.1@3920,4655 3925,4650 D7.A@4235,4650
NetD8_1: D8.A R15.1 | length 317.1
  Top Layer w12: R15.1@3920,4255 4230,4255 D8.A@4235,4250
NetD9_2: D9.2 J6.1 | length 1452.1
  Top Layer w30: D9.2@2211.42,3035 3056.26,3035 3229.26,2862 3277.29,2862 3327.53,2811.76 3327.53,2664.55 3275,2612.02 J6.1@3275,2590
NetD10_2: D10.2 J1.2 | length 1183
  Top Layer w40: J1.2@1140,2800 1140,2745 1180,2705 1285,2705 1320,2740 1320,3140 1350,3170 1633.58,3170 D10.2@1768.58,3035
NetD11_1: D11.A R60.1 | length 130
  Top Layer w30: D11.A@2985,3940 R60.1@2985,4070
NetD12_1: D12.A R61.1 | length 120
  Top Layer w30: D12.A@3080,3940 R61.1@3080,4060
NetJ1_3: J1.3 U2.7 | length 3186.8
  Top Layer w12: v1(1375,4705) 1375,4696.01 1454,4617.01 1454,4577.99 1419,4542.99 1419,4160.46 U2.7@1415,4156.46
  Bottom Layer w12: J1.3@1240,2900 1190,2850 1050,2850 1025,2875 1025,4748.28 1091.72,4815 1345,4815 1375,4785 v1(1375,4705)
NetJ1_4: J1.4 U2.6 | length 2941.5
  Top Layer w12: v1(1345,4770) 1351.01,4770 1474,4647.01 1474,4569.7 1465,4560.7 U2.6@1465,4156.46
  Bottom Layer w12: J1.4@1140,2900 1055,2900 1045,2910 1045,4740 1100,4795 1320,4795 v1(1345,4770) v1@1350,4770
NetJ1_29: J1.29 U3.78 | length 823.1
  Bottom Layer w10: 1921.46,4233.54 1921.46,4183.93 U3.78@1923.15,4182.24
  Bottom Layer w12: J1.29@1240,4200 1284.18,4200 1319.18,4165 1578.28,4165 1703.28,4290 1865,4290 1921.46,4233.54
NetJ1_30: J1.30 U3.79 | length 985.4
  Bottom Layer w10: 1629,4244 1629.05,4244 1668.33,4283.27 1668.33,4284 1693.33,4309 1873.88,4309 1942.83,4240.04 U3.79@1942.83,4182.24
  Bottom Layer w12: J1.30@1140,4200 1140.54,4200 1186.63,4246.09 1266.37,4246.09 1327.46,4185 1570,4185 1629,4244
NetJ1_31: J1.31 U3.92 | length 1573.7
  Top Layer w10: v1(1350,4300) 1350,4560 1400,4610 v1(1400,4620)
  Bottom Layer w10: J1.31@1240,4300 v1(1350,4300) ; v1(1400,4620) 1527.23,4620 1653.23,4494 2033.67,4494 2049.67,4478 2147,4478 2198.74,4426.26 U3.92@2198.74,4182.24
NetJ1_32: J1.32 U3.91 | length 1656.2
  Top Layer w8: J1.32@1140,4300 1184.09,4255.91 1349.1,4255.91 1380,4286.82 1380,4545 v1(1425,4590)
  Bottom Layer w8: v1(1425,4590) 1430,4590 1528,4492 1631.18,4492 1646.18,4477 2026.63,4477 2042.63,4461 2139.96,4461 2179.06,4421.9 U3.91@2179.06,4182.24
NetJ2_1: J2.1 J3.1 R17.2 | length 242.3
  Bottom Layer w12: R17.2@2850,4775 2865,4775 J3.1@2955,4685 J2.1@3055,4685
NetJ2_2: J2.2 U3.94 | length 1350.7
  Bottom Layer w8: U3.94@2238.11,4182.24 2238.11,4285.74 2378.37,4426 3016,4426 3098.53,4508.53
  Bottom Layer w12: J2.2@3055,4785 3098.53,4741.47 3098.53,4508.53
NetJ2_3: J2.3 J3.3 R18.1 | length 240.7
  Bottom Layer w8: J2.3@3055,4885 J2.3@3065,4885
  Bottom Layer w12: J3.3@2955,4885 J2.3@3055,4885 3078.78,4885 R18.1@3154.39,4809.39
NetJ3_2: J3.2 U3.37 | length 2660.8
  Top Layer w8: v1(2130,3435) 2150,3415 2525,3415 2579,3361 2839.18,3361 2887,3408.82 2887,3431.18 2875,3443.18 2875,4295 2720,4450 v1(2720,4495)
  Bottom Layer w8: v1(2130,3435) 2139.69,3444.69 U3.37@2139.69,3587.76
  Bottom Layer w12: v1(2720,4495) 2720,4485 2809,4574 2809,4602.01 2805,4606.01 2805,4809.8 2814.2,4819 2921,4819 J3.2@2955,4785
NetJ4_9: J4.9 R37.2 U4.28 | length 624.2
  Top Layer w12: v1(3635,2945) 3676.01,2945 3896.01,3165 J4.9@3950,3165
  Bottom Layer w8: R37.2@3545,2880 3560,2880 v1@3625,2945 ; v1(3635,2945) 3635,2975
  Bottom Layer w10: U4.28@3614.21,3036.54 3615,3035.75 3615,2995 3635,2975
  Bottom Layer w12: R37.2@3545,2880 R37.2@3556.01,2880